# Altium PCB Pump_Agri.PcbDoc (part 2 of 2)
Units mm, origin at the board's own origin, x right, y up, seen from the top; angles counter-clockwise.
Board outline 92.13 x 124.56 mm, 2 copper layers (Top Layer, Bottom Layer); 134 components, 82 nets, 406 pads, 376 vias.
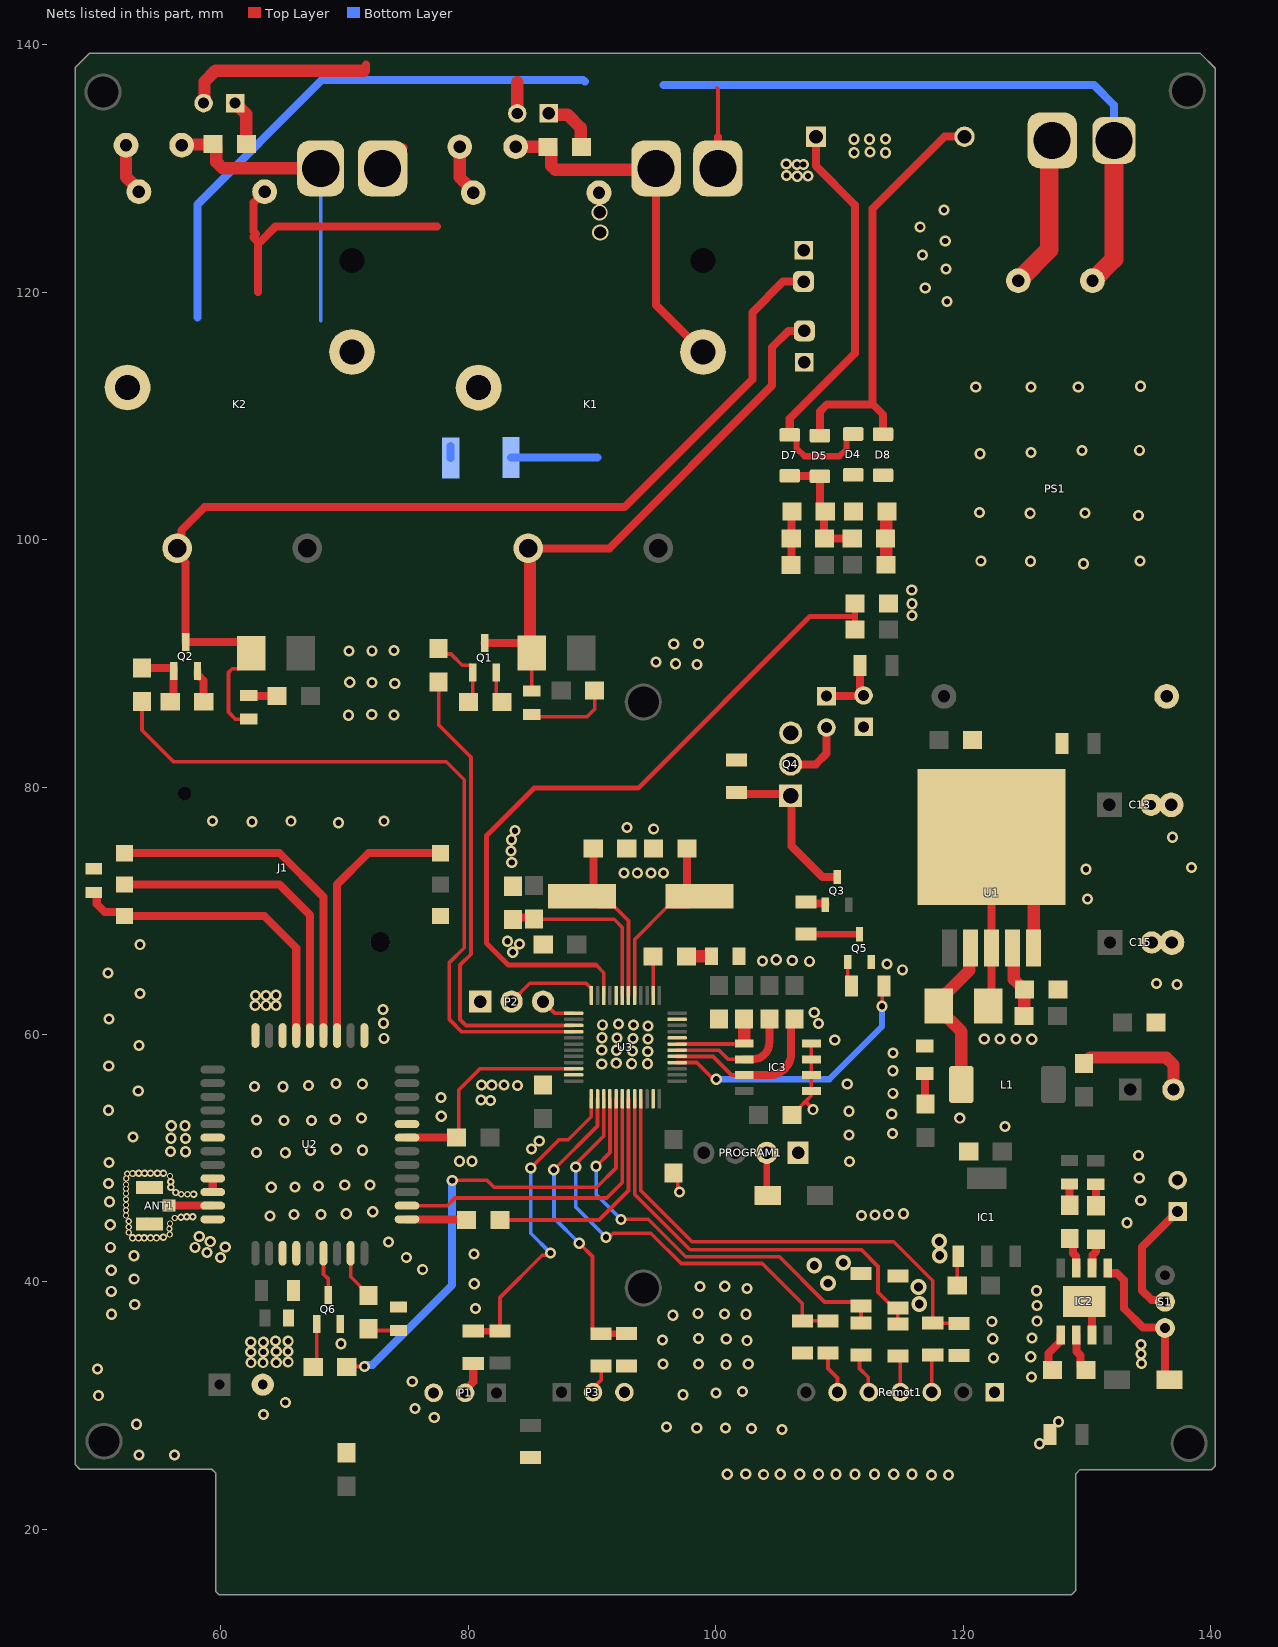
[diagram p2: the nets of this part, all layers, seen from the top]

## Via types
v1: diameter 0.9, hole 0.5, Top Layer to Bottom Layer, 325 vias
v2: diameter 0.5, hole 0.3, Top Layer to Bottom Layer, 19 vias
v3: diameter 0.6, hole 0.3, Top Layer to Bottom Layer, 19 vias
v4: diameter 1.27, hole 0.711, Top Layer to Bottom Layer, 9 vias
v5: diameter 1.3, hole 1, Top Layer to Bottom Layer, 2 vias
v6: diameter 0.9, hole 0.5, Top Layer to Bottom Layer, tented both sides, 2 vias

## Nets (pads, with @x,y where several pads share a name; then routed paths per layer and width w, separated by ;. In a path a pad name is that pad's centre, name@x,y a point inside that pad or via, vN(x,y) a via of type N, cw(c..) or ccw(c..) an arc to the next point about the centre after c; other vN are vias at no path point) (continued)
GND: 2.2k.2 ANT1.2 battery1.1 battery3.2 battery4.1 C1.1 C2.1 C3.1 C4.1 C5.2 C6.2 C7.2 C8.2 C9.2 C10.2 C11.2 C12.1 C13.2 C14.1 C15.2 C17.2 C19.1 C20.1 C21.1 C22.1 C23.2 C24.2 C25.2 C26.2 C27.1 C28.1 cs1.1 D1.1 D4.1 D8.1 IC1.1 IC2.1 IC2.3 IC2.9 IC3.1 IC3.2 IC3.3 IC3.4 J1.C5 LD1.2 LD2.2 LED5.1 Out3.1 P1.3 P2.1 P3.3 PROGRAM1.1 PS1.3 Q1.2 Q2.2 Q4.3 Q5.2 Q6.2 R4.1 R5.1 R14.2 R16.1 R22.2 R27.2 R29.2 R30.2 R31.2 R32.2 R43.2 Remot1.1 U1.3 U1.5 U2.8 U2.13 U2.19 U2.21 U2.27 U2.30 U2.31 U2.33 U2.36 U2.37 U3.8 U3.23 U3.35 U3.44 U3.47 | length 68.1
  Top Layer w0.3: U2.33@59.324,45.074 U2.33@59.334,45.064 ; C24.2@65.466,37.084 C24.2@65.466,37.309 ; cs1.1@65.867,39.319 cs1.1@66.084,39.536 ; U2.13@71.584,59.914 71.584,60.398 U2.13@71.746,60.56 ; LED5.1@74.346,37.983 LED5.1@74.646,38.283 ; J1.C5@77.743,69.571 J1.C5@77.902,69.412 ; Q1.2@82.255,89.274 82.255,87.319 R14.2@82.706,86.868 ; C1.1@86.008,67.361 C1.1@86.167,67.202 ; C3.1@86.2,55.931 C3.1@86.349,56.08 ; R43.2@92.607,33.071 R43.2@92.759,33.223 ; C2.1@96.585,48.808 96.926,48.467 96.926,47.396 v1(97.053,47.269) ; C4.1@100.222,61.229 C4.1@100.254,61.261 ; C25.2@106.15,53.492 106.2,53.492 106.775,54.067 106.775,54.117 107.246,54.588 ; IC3.4@107.716,59.258 IC3.3@107.716,57.988 IC3.2@107.716,56.718 IC3.1@107.716,55.448 107.716,55.058 107.246,54.588 ; v1(107.848,53.924) 107.848,53.985 107.246,54.588 ; C8.2@119.278,39.501 C8.2@119.503,39.726 IC1.1@119.503,41.996 ; IC1.1@119.417,41.91 IC1.1@119.503,41.996 ; IC1.1@119.595,42.087 IC1.1@119.503,41.996
  Top Layer w0.65: ANT1.2@54.016,44.902 ANT1.2@54.216,44.702 ; ANT1.2@54.117,47.752 ANT1.2@54.216,47.652 ; Q2.2@58.1,89.376 58.1,89.001 58.125,88.976 58.219,88.976 58.602,88.593 R22.2@58.602,86.893 ; U2.31@59.334,47.264 U2.30@59.334,48.364 ; U2.21@62.784,59.914 U2.21@62.784,60.589 ; R16.1@105.834,99.822 R16.1@106.088,100.076 ; C21.1@106.063,97.942 106.101,97.98 106.101,102.222 C19.1@106.139,102.26 ; C20.1@111.094,102.284 C20.1@111.117,102.26 ; D1.1@122.018,62.306 122.276,62.564 U1.3@122.276,66.976 U1.3@122.276,75.976 U1.3@126.441,80.141 ; 2.2k.2@127.203,32.868 126.873,33.198 126.873,34.239 127.356,34.722 127.839,35.205 127.839,35.693 IC2.1@127.864,35.718 ; IC2.9@129.769,38.43 130.404,37.795 IC2.3@130.404,35.718
  Top Layer w1: U1.5@125.676,66.976 U1.3@125.676,72.576 ; C17.2@129.769,57.666 129.769,57.716 129.994,57.941 130.044,57.941 130.244,58.141 136.394,58.141 136.98,57.555 C5.2@136.98,55.55
  other v1: 117.424,24.409 118.796,24.409 103.861,24.435 100.914,24.46 105.207,24.46 106.782,24.46 108.306,24.46 109.703,24.46 111.252,24.46 112.827,24.46 114.376,24.46 115.849,24.46 102.413,24.486 53.365,26.01 56.236,26.01 126.162,26.924 105.334,28.067 102.87,28.169 98.45,28.194 100.787,28.194 96.012,28.27 53.162,28.499 127.686,28.702 77.241,29.058 63.449,29.286 75.692,29.769 65.202,30.251 50.089,30.81 97.333,30.886 100,31.013 102.159,31.14 75.463,31.953 125.501,32.309 50.013,32.969 100.813,33.325 95.733,33.376 98.603,33.376 102.616,33.376 134.391,33.401 62.433,33.477 63.398,33.477 64.465,33.477 65.43,33.528 122.428,33.858 125.451,33.96 134.366,34.188 62.408,34.341 63.424,34.341 64.465,34.392 65.405,34.392 134.366,34.95 69.698,35.001 63.424,35.128 62.408,35.154 65.43,35.204 64.414,35.23 102.514,35.255 95.682,35.306 100.838,35.382 122.377,35.408 98.603,35.433 125.552,35.458 122.301,36.805 125.959,36.83 96.52,37.313 51.156,37.389 102.438,37.389 100.686,37.414 98.552,37.465 80.569,37.846 125.959,38.1 53.035,38.176 51.13,39.243 125.908,39.294 102.514,39.472 98.704,39.624 100.711,39.649 80.467,39.853 52.984,40.234 51.13,40.945 76.302,40.996 59.969,41.986 74.981,41.986 52.959,42.113 80.442,42.266 58.877,42.393 51.079,42.799 57.912,42.799 60.35,42.824 73.533,43.231 59.131,43.256 58.242,43.663 51.054,44.628 133.223,44.78 63.957,45.339 111.76,45.364 112.852,45.415 65.913,45.441 68.072,45.441 113.944,45.441 70.129,45.517 115.164,45.517 72.263,45.669 50.978,46.482 134.341,46.584 64.059,47.65 65.989,47.676 67.894,47.752 70.002,47.828 72.034,47.828 50.902,47.955 134.214,48.412 50.952,49.657 110.795,49.733 79.273,49.759 80.289,49.759 134.163,50.216 65.202,50.444 62.865,50.47 57.125,50.521 55.931,50.546 67.234,50.622 71.45,50.648 69.317,50.724 85.086,50.753 85.721,51.388 57.125,51.587 55.956,51.613 52.883,51.714 110.769,51.867 114.275,51.994 123.368,52.553 55.982,52.629 57.099,52.629 65.1,53.061 67.31,53.061 62.865,53.086 69.24,53.137 119.71,53.238 71.349,53.264 77.8,53.391 114.214,53.568 110.769,53.797 50.902,53.873 81.796,54.668 81.008,54.694 77.775,54.915 114.3,55.245 53.315,55.423 65.024,55.778 62.713,55.804 67.081,55.88 83.955,55.888 81.89,55.905 81.051,55.931 82.88,55.931 71.425,56.007 110.617,56.007 69.291,56.032 114.3,57.074 50.927,57.455 90.78,57.607 93.193,57.633 94.463,57.633 91.948,57.683 114.325,58.496 94.488,58.623 93.269,58.674 91.973,58.725 90.78,58.75 53.365,59.106 109.601,59.563 125.527,59.614 94.513,59.639 121.691,59.639 122.961,59.639 124.257,59.639 93.294,59.665 73.177,59.69 91.999,59.715 90.805,59.741 94.513,60.681 93.345,60.757 90.83,60.782 92.126,60.858 108.28,60.884 73.127,60.909 50.952,61.265 107.95,61.773 73.101,62.027 62.763,62.332 64.44,62.332 63.627,62.357 62.789,63.144 63.627,63.144 64.44,63.17 53.467,63.322 137.262,64.033 135.611,64.11 50.876,64.973 115.087,65.227 113.817,65.71 107.569,65.913 103.759,65.938 106.172,65.989 104.877,66.04 83.581,66.643 53.467,67.259 84.115,67.304 83.149,67.532 130.023,70.942 92.583,73.05 93.65,73.05 94.767,73.05 95.758,73.05 129.921,73.355 138.43,73.508 83.498,73.896 83.439,74.828 83.48,75.736 136.906,75.946 83.759,76.473 94.971,76.606 92.812,76.733 69.494,77.114 62.509,77.191 65.659,77.241 73.177,77.241 59.309,77.267 70.307,85.801 73.99,85.827 72.187,85.852 74.041,88.367 72.212,88.443 70.409,88.468 98.476,89.916 96.749,89.967 95.148,90.094 70.358,90.983 72.212,91.008 73.99,91.034 96.596,91.567 98.603,91.592 115.849,93.853 115.849,94.818 115.824,95.936 129.718,98.044 125.425,98.247 121.412,98.273 134.264,98.273 134.163,101.956 125.4,102.133 129.819,102.159 121.31,102.184 121.336,106.934 125.476,107.036 129.591,107.188 134.239,107.213 121.006,112.344 125.476,112.344 129.286,112.344 134.315,112.395 118.676,119.232 116.916,120.345 118.593,121.869 116.688,123.012 118.542,124.13 116.51,125.273 118.44,126.644 106.578,129.362 107.442,129.388 105.715,129.413 106.553,130.302 107.066,130.302 105.689,130.353 111.176,131.267 113.716,131.267 112.446,131.318 111.15,132.359 112.42,132.359 113.716,132.385
  other v2: 55.855,43.84 52.553,43.993 55.829,44.298 52.553,44.45 55.88,44.729 52.553,44.907 56.261,45.161 52.324,45.364 52.324,45.796 52.324,46.228 52.324,46.685 56.794,47.092 57.302,47.092 52.324,47.142 52.324,47.523 52.324,47.879 52.349,48.362 55.88,48.565 52.426,48.743
  other v3: 52.857,43.561 53.34,43.561 53.797,43.561 54.305,43.561 54.788,43.561 55.347,43.612 56.769,45.237 57.226,45.263 57.709,45.263 57.785,47.092 56.337,47.229 55.956,47.65 55.931,48.108 52.857,48.768 53.365,48.793 53.823,48.793 54.305,48.793 54.864,48.793 55.347,48.793
  other v4: 116.441,38.227 116.383,39.599 109.068,39.903 107.95,41.326 110.287,41.554 118.085,42.139 118.059,43.282
N: battery2.2 battery5.2 out1.2 out2.2 PS1.2 T1.1 | length 39.5
  Top Layer w0.3: 100.076,136.525 100.163,136.438 100.163,132.552
  Top Layer w0.65: battery5.2@58.598,135.28 battery5.2@58.672,135.354 ; 71.547,137.897 71.704,138.054 71.704,138.379 ; out2.2@73.061,129.997 73.061,130.097 74.636,131.672 out2.2@74.736,131.672 ; out1.2@100.163,129.997 100.163,132.552
  Top Layer w1: battery5.2@58.672,135.354 58.672,137.005 59.563,137.897 71.547,137.897 ; battery2.2@83.947,134.442 83.947,136.957 ; T1.1@126.949,132.029 T1.1@127.178,132.258
  Top Layer w1.5: PS1.2@124.434,120.925 126.949,123.44 T1.1@126.949,132.029
Net2.2k_1: 2.2k.1 IC2.2 | length 3.1
  Top Layer w0.65: IC2.2@129.134,35.718 129.134,34.392 129.464,34.061 129.464,33.257 2.2k.1@129.853,32.868
Net4.7k_1: 4.7k.1 U2.41 | length 4
  Top Layer w0.3: U2.41@70.484,42.314 70.484,40.415 71.933,38.967 4.7k.1@71.933,38.917
Net4.7k_2: 4.7k.2 LED5.2 | length 2.5
  Top Layer w0.3: 4.7k.2@71.933,36.217 72.066,36.083 LED5.2@74.346,36.083
NetANT1_1: ANT1.1 U2.32 | length 3.5
  Top Layer w0.65: ANT1.1@55.816,46.179 55.832,46.164 U2.32@59.334,46.164
Netbattery1_2: battery1.2 D3.1 K1.2 LED1.1 Q1.3 | length 47
  Top Layer w0.3: LED1.1@85.115,87.752 D3.1@85.115,90.834
  Top Layer w0.65: Q1.3@81.305,91.624 84.325,91.624 84.974,90.976 85.115,90.834 D3.1@85.119,90.83 ; K1.2@84.828,99.296 91.397,99.296 104.546,112.446 104.546,115.545 105.867,116.865 battery1.2@107.15,116.865
  Top Layer w1: K1.2@84.828,99.296 84.974,99.151 D3.1@84.974,90.976
Netbattery2_1: battery2.1 R7.2 | length 4.6
  Top Layer w1: battery2.1@86.487,134.442 86.586,134.343 88.009,134.343 89.069,133.282 89.069,131.788 R7.2@89.132,131.724
Netbattery3_1: battery3.1 S1.2 | length 9.8
  Top Layer w0.65: S1.2@136.296,38.405 136.161,38.54 135.221,38.54 134.442,39.319 134.442,42.824 battery3.1@137.312,45.695
Netbattery4_2: battery4.2 D6.1 K2.2 LED3.1 Q2.3 | length 84.1
  Top Layer w0.3: LED3.1@62.255,85.486 61.173,85.486 60.604,86.055 60.604,89.256 60.904,89.555 61.437,89.555 62.437,90.555 D6.1@62.437,90.805
  Top Layer w0.65: D6.1@62.437,90.805 62.437,90.901 61.612,91.726 Q2.3@57.15,91.726 57.15,98.136 56.457,98.83 K2.2@56.457,99.303 56.669,99.516 56.791,99.638 56.791,100.733 58.674,102.616 92.608,102.616 102.946,112.954 102.946,118.364 105.435,120.853 battery4.2@106.477,120.853
Netbattery5_1: battery5.1 R8.2 | length 3.7
  Top Layer w1: battery5.1@61.138,135.28 62.056,134.362 R8.2@62.056,131.978
NetBuzzer1_1: Buzzer1.1 Out3.2 R25.2 | length 5.6
  Top Layer w0.65: Buzzer1.1@108.941,87.351 108.966,87.376 111.912,87.376 Out3.2@111.938,87.401 111.938,87.631 111.633,87.936 R25.2@111.633,89.84
NetBuzzer1_2: Buzzer1.2 Q4.2 | length 5.4
  Top Layer w0.65: Q4.2@106.045,81.839 108.077,81.839 108.941,82.702 Buzzer1.2@108.941,84.811
NetC16_1: C16.1 R6.2 | length 4.2
  Top Layer w1: R6.2@79.299,131.75 79.299,129.275 80.391,128.183 C16.1@80.391,128.041
NetC18_1: C18.1 R17.2 | length 4.2
  Top Layer w1: R17.2@52.324,131.877 52.324,129.301 53.365,128.259 C18.1@53.365,128.118
NetC19_2: C19.2 D5.2 D7.2 R12.1 R16.2 | length 9.9
  Top Layer w0.65: D7.2@105.969,105.157 105.994,105.132 108.382,105.132 D5.2@108.407,105.106 108.407,102.66 108.807,102.26 C19.2@108.839,102.26 ; C19.2@108.723,102.26 108.723,100.141 R16.2@108.788,100.076 R12.1@111.02,100.076
NetC20_2: C20.2 R12.2 R13.1 | length 4.3
  Top Layer w1: R13.1@113.741,97.968 113.779,98.006 113.779,100.076 113.779,102.222 C20.2@113.817,102.26
NetC27_2: C27.2 U3.5 Y1.1 | length 15.7
  Top Layer w0.3: U3.5@93.435,63.159 93.435,67.679 96.076,70.321 97.829,70.321 Y1.1@98.679,71.171
  Top Layer w0.65: C27.2@97.667,75.032 97.667,71.82 98.342,71.145 Y1.1@98.679,71.145
NetC28_2: C28.2 U3.6 Y1.2 | length 14.1
  Top Layer w0.3: Y1.2@89.713,71.145 90.537,70.321 91.807,70.321 92.935,69.194 U3.6@92.935,63.159
  Top Layer w0.65: Y1.2@89.713,71.145 90.09,71.523 C28.2@90.09,75.032
NetD1_2: D1.2 L1.1 U1.2 | length 12.8
  Top Layer w1: L1.1@119.837,55.956 119.837,60.231 118.012,62.056 D1.2@118.012,62.306 118.662,62.956 118.662,63.366 120.476,65.18 120.476,66.876 U1.2@120.576,66.976
NetD2_A: D2.A IC2.5 S1.1 | length 12.7
  Top Layer w0.65: IC2.5@131.674,41.142 131.674,40.73 131.699,40.705 132.422,40.705 132.969,40.157 132.969,37.871 134.521,36.319 136.255,36.319 S1.1@136.296,36.278 ; S1.1@136.296,36.27 136.296,32.48 136.721,32.055 D2.A@136.786,32.055
NetD4_2: D4.2 D7.1 T2.1 | length 34.3
  Top Layer w0.3: D4.2@110.562,108.133 110.962,108.533 D4.2@111.1,108.533
  Top Layer w0.5: D7.1@106.506,108.057 106.506,107.387 107.163,106.731 109.982,106.731 110.562,107.311 D4.2@110.562,108.133
  Top Layer w0.65: D7.1@105.969,108.457 105.969,109.779 111.227,115.037 111.227,127.053 108.091,130.188 T2.1@108.091,132.563
NetD5_1: D5.1 D8.2 T2.2 | length 34.9
  Top Layer w0.6: 112.674,110.922 113.513,110.084
  Top Layer w0.65: D5.1@108.407,108.406 108.407,110.363 108.966,110.922 112.674,110.922 112.674,126.771 118.466,132.563 T2.2@120.091,132.563 ; D8.2@113.513,108.508 113.513,110.084
NetD_BATT1_A: D_BATT1.A PROGRAM1.2 | length 3.5
  Top Layer w0.3: D_BATT1.A@104.104,47.07 D_BATT1.A@104.184,46.99
  Top Layer w0.5: D_BATT1.A@104.104,47.07 PROGRAM1.2@104.104,50.438
NetIC2_6: IC2.6 R21.2 | length 2.4
  Top Layer w0.65: IC2.6@130.404,41.142 130.429,41.167 130.429,42.164 130.708,42.443 R21.2@130.708,43.456
NetIC2_7: IC2.7 R15.2 | length 2.6
  Top Layer w0.65: R15.2@128.6,43.506 128.88,43.227 128.88,42.316 129.109,42.087 129.109,41.167 IC2.7@129.134,41.142
NetLD1_1: LD1.1 R2.2 | length 2.5
  Top Layer w0.65: LD1.1@116.891,56.863 116.916,56.837 116.916,54.411 R2.2@116.942,54.385
NetLD2_1: LD2.1 R23.2 | length 2
  Top Layer w1: R23.2@97.616,66.319 LD2.1@99.662,66.319
NetLED1_2: LED1.2 R10.2 | length 6.9
  Top Layer w0.3: LED1.2@85.115,85.852 85.293,85.674 89.586,85.674 90.199,86.288 R10.2@90.199,87.808
NetLED2_1: LED2.1 R15.1 | length 1.7
  Top Layer w0.65: LED2.1@128.575,47.92 128.588,47.907 128.588,46.219 R15.1@128.6,46.206
NetLED3_2: LED3.2 R19.2 | length 2.3
  Top Layer w0.65: LED3.2@62.255,87.386 62.273,87.368 64.52,87.368 R19.2@64.538,87.351
NetLED4_1: LED4.1 R21.1 | length 1.7
  Top Layer w0.65: R21.1@130.708,46.156 LED4.1@130.708,47.894
NetP1_2: P1.2 R39.2 | length 2.7
  Top Layer w0.65: P1.2@79.729,31.039 79.729,31.266 80.389,31.926 R39.2@80.389,33.426
NetP3_2: P3.2 R42.2 | length 2.4
  Top Layer w0.3: P3.2@90.067,31.09 90.067,31.414 90.727,32.075 R42.2@90.727,33.218
NetQ1_1: Q1.1 R9.1 R14.1 | length 6.4
  Top Layer w0.3: R9.1@77.597,91.19 78.041,90.746 78.596,90.746 79.492,89.849 80.205,89.849 80.355,89.699 Q1.1@80.355,89.274 80.355,87.217 R14.1@80.006,86.868
NetQ2_1: Q2.1 R20.1 R22.1 | length 5.4
  Top Layer w0.65: R20.1@53.619,89.615 56.175,89.615 56.2,89.59 Q2.1@56.2,89.376 56.175,89.351 56.175,87.167 R22.1@55.902,86.893
NetQ3_1: Q3.1 R26.2 | length 1.7
  Top Layer w0.65: R26.2@107.264,70.714 107.382,70.596 108.829,70.596 108.854,70.571 Q3.1@108.854,70.478
NetQ3_3: Q3.3 Q4.1 R27.1 | length 13.3
  Top Layer w0.65: R27.1@101.676,79.578 101.816,79.438 105.905,79.438 Q4.1@106.045,79.299 ; Q4.1@106.121,79.299 106.121,75.235 108.628,72.728 Q3.3@109.804,72.728
NetQ5_1: Q5.1 R28.2 | length 2
  Top Layer w0.3: R28.2@110.658,63.851 Q5.1@110.658,65.855
NetQ5_3: Q5.3 R26.1 | length 4.3
  Top Layer w0.3: R26.1@107.264,68.118 R26.1@107.277,68.105
  Top Layer w0.5: R26.1@107.277,68.105 Q5.3@111.608,68.105
NetQ6_1: Q6.1 R33.1 | length 3.6
  Top Layer w0.3: R33.1@67.459,33.122 67.732,33.395 Q6.1@67.732,36.614
NetQ6_3: Q6.3 U2.39 | length 3.5
  Top Layer w0.3: U2.39@68.284,42.314 68.284,40.631 68.682,40.234 Q6.3@68.682,38.964
NetR1_1: R1.1 R4.2 U1.4 | length 5.9
  Top Layer w1: U1.4@123.976,66.976 124.076,66.876 124.076,64.466 124.889,63.652 R4.2@124.939,63.652 124.926,63.64 124.926,61.506 R1.1@124.913,61.493
NetR18_1: R18.1 Remot1.3 | length 3
  Top Layer w0.3: Remot1.3@117.45,31.09 117.45,34.005 R18.1@117.526,34.082
NetR37_1: R37.1 Remot1.4 | length 3
  Top Layer w0.3: R37.1@114.706,34.011 114.91,33.807 Remot1.4@114.91,31.09
NetR40_1: R40.1 U3.31 | length 18.8
  Top Layer w0.3: R40.1@82.554,45.009 90.551,45.009 92.935,47.392 U3.31@92.935,54.799
NetR44_1: R44.1 Remot1.5 | length 3.4
  Top Layer w0.3: R44.1@111.735,34.087 111.608,33.96 111.608,32.995 112.313,32.29 112.313,31.147 Remot1.5@112.37,31.09
NetR45_1: R45.1 Remot1.6 | length 4.1
  Top Layer w0.3: R45.1@109.542,33.884 109.167,34.259 R45.1@109.068,34.259 109.068,33.01 109.83,32.248 Remot1.6@109.83,31.09
ON_Queqtel: R33.2 U3.29 | length 39.4
  Top Layer w0.3: R33.2@70.159,33.122 70.209,33.172 v1(71.603,33.172) ; v1(78.689,48.209) 81.517,48.209 82.076,47.65 90.373,47.65 91.935,49.212 U3.29@91.935,54.799
  Bottom Layer w0.65: v1(71.603,33.172) 71.721,33.291 72.229,33.291 78.689,39.751 v1(78.689,48.209)
P: C16.2 C18.2 K1.1 K2.1 PS1.1 T1.2 | length 121
  Top Layer w0.65: 62.992,120.015 62.992,123.876 ; C18.2@63.525,128.118 62.636,127.229 62.636,124.892 62.84,124.689 62.636,124.485 62.636,124.418 63.001,124.053 63.17,124.053 64.414,125.298 77.457,125.298 ; K1.1@80.823,112.286 K1.1@81.354,112.818
  Top Layer w1.5: PS1.1@130.434,120.925 132.178,122.669 T1.2@132.178,132.258
  Bottom Layer w0.65: 58.09,117.932 58.09,127.076 68.174,137.16 89.256,137.16 89.408,137.008 ; 95.783,136.728 130.556,136.728 132.178,135.106 T1.2@132.178,132.258
  other v5: 90.653,124.816 90.602,126.441
P_1: K1.4 out1.1 R6.1 R7.1 R11.2 | length 34.4
  Top Layer w0.65: out1.1@95.163,129.997 95.163,118.952 K1.4@98.958,115.157
  Top Layer w1: R6.1@83.82,131.75 83.833,131.737 86.42,131.737 R7.1@86.432,131.724 86.482,131.724 86.707,131.499 86.707,130.209 87.02,129.896 out1.1@93.294,129.896
  Bottom Layer w0.65: R11.2@83.439,106.629 90.431,106.629
P_2: K2.4 out2.1 R8.1 R11.1 R17.1 | length 26.4
  Top Layer w1: R17.1@56.82,131.877 56.871,131.928 R8.1@59.305,131.928 ; R8.1@59.356,131.978 59.406,131.978 59.631,131.753 59.631,130.513 60.147,129.997 out2.1@68.061,129.997
  Bottom Layer w0.3: 68.061,117.689 out2.1@68.061,129.997
  Bottom Layer w0.65: K2.4@70.587,115.164 K2.4@70.954,115.164 ; R11.1@78.562,106.604 R11.1@78.562,107.555
pa0: R3.1 R5.2 U3.10 | length 60.7
  Top Layer w0.3: 90.322,65.608 90.935,64.996 U3.10@90.935,63.159
  Top Layer w0.4: 90.322,65.608 83.236,65.608 81.458,67.386 81.458,76.073 85.293,79.908 93.726,79.908 107.607,93.789 111.248,93.789
  Top Layer w0.5: R3.1@110.908,92.395 R3.1@111.248,92.735 111.248,93.789 R5.2@111.248,94.844
Pa2: P2.2 U3.12 | length 7.8
  Top Layer w0.3: P2.2@83.49,62.662 84.963,64.135 85.496,64.135 89.508,64.135 89.855,63.789 89.925,63.789 89.935,63.779 U3.12@89.935,63.159
Pa3: P2.3 U3.13 | length 2.9
  Top Layer w0.3: P2.3@86.03,62.662 86.963,61.729 U3.13@88.505,61.729
Pa11: R31.1 R37.2 U3.32 | length 35.3
  Top Layer w0.3: U3.32@93.435,54.799 93.435,47.078 97.917,42.596 111.76,42.596 113.106,41.25 113.106,39.167 114.381,37.892 R31.1@114.706,37.892 R37.2@114.706,36.607
Pa12: R18.2 R32.1 U3.33 | length 39.6
  Top Layer w0.3: U3.33@93.935,54.799 93.935,47.391 98.069,43.256 114.376,43.256 117.526,40.107 R18.2@117.526,36.678 117.546,36.657 R32.1@119.634,36.657
PB4: R28.1 U3.40 | length 21.7
  Top Layer w0.3: U3.40@96.865,57.729 98.456,57.729 99.797,56.388 v1(100.025,56.388) ; v1(113.436,62.281) R28.1@113.436,63.424
  Bottom Layer w0.5: v1(100.025,56.388) 109.169,56.388 113.436,60.655 v1(113.436,62.281)
PB12: R36.1 R39.1 U3.25 | length 26
  Top Layer w0.3: R36.1@82.528,36.022 R36.1@82.548,36.043 82.548,38.733 85.971,42.156 86.454,42.156 v1(86.639,42.342) ; v1(85.039,49.2) 87.325,51.486 88.062,51.486 89.935,53.359 U3.25@89.935,54.799
  Top Layer w0.5: R39.1@80.389,36.022 R36.1@82.528,36.022
  Bottom Layer w0.3: v1(85.039,49.2) 85.039,43.942 v1(86.639,42.342)
PB13: R42.1 R43.1 U3.26 | length 24.3
  Top Layer w0.3: v1(86.893,49.073) 90.435,52.614 U3.26@90.435,54.799 ; v1(88.951,43.129) 90.027,42.053 90.027,36.189 90.402,35.814 R42.1@90.727,35.814 R42.1@90.732,35.819
  Top Layer w0.5: R42.1@90.732,35.819 R43.1@92.759,35.819
  Bottom Layer w0.3: v1(86.893,49.073) 86.919,49.047 86.919,45.161 v1(88.951,43.129)
PB14: R29.1 R45.2 U3.27 | length 35
  Top Layer w0.3: v1(88.671,49.301) 88.671,49.53 90.935,51.793 U3.27@90.935,54.799 ; v1(91.11,43.612) 91.372,43.612 91.702,43.942 94.742,43.942 97.197,41.487 103.75,41.487 106.985,38.252 R29.1@106.985,36.835 107.005,36.855 R45.2@109.068,36.855
  Bottom Layer w0.3: v1(88.671,49.301) 88.671,46.05 v1(91.11,43.612)
PB15: R30.1 R44.2 U3.28 | length 34.7
  Top Layer w0.3: v1(90.322,49.352) 91.435,50.464 U3.28@91.435,54.799 ; v1(92.329,45.06) 94.539,45.06 97.561,42.037 105.131,42.037 108.784,38.384 111.395,38.384 R30.1@111.709,38.069 ; R44.2@111.735,36.683 R30.1@111.735,38.069
  Bottom Layer w0.3: v1(90.322,49.352) 90.322,47.066 v1(92.329,45.06)
PC13: R23.1 U3.2 | length 3.2
  Top Layer w0.2: R23.1@94.916,66.319 cw(c94.916,66.301) R23.1@94.935,66.301
  Top Layer w0.3: U3.2@94.935,63.159 R23.1@94.935,66.301
RI: R35.1 U2.7 U3.22 | length 17.9
  Top Layer w0.3: R35.1@79.041,51.664 79.223,51.845 79.223,55.524 80.927,57.229 U3.22@88.505,57.229
  Top Layer w0.65: U2.7@75.034,51.664 R35.1@79.041,51.664
RLY_1: R9.2 U3.15 | length 38.1
  Top Layer w0.3: R9.2@77.597,88.49 77.597,85.014 80.208,82.403 80.208,66.492 79.324,65.608 79.324,61.214 79.809,60.729 U3.15@88.505,60.729
RLY_2: R20.2 U3.16 | length 60.3
  Top Layer w0.3: R20.2@53.619,86.915 53.619,84.582 56.159,82.042 78.207,82.042 79.658,80.591 79.658,67.009 78.461,65.811 78.461,61.214 79.446,60.229 U3.16@88.505,60.229
RST: C22.2 R24.1 U3.7 | length 14.3
  Top Layer w0.3: 86.058,69.31 91.777,69.31 92.435,68.652 U3.7@92.435,63.159
  Top Layer w0.65: C22.2@83.439,69.465 R24.1@85.547,69.465
RX: U2.2 U3.30 | length 24.9
  Top Layer w0.3: U2.2@75.034,46.164 78.295,46.164 78.918,46.787 91.186,46.787 92.435,48.035 U3.30@92.435,54.799
SCL: IC3.6 R38.1 U3.42 | length 10.5
  Top Layer w0.3: U3.42@96.865,58.729 100.25,58.729 100.99,57.988 IC3.6@102.292,57.988
  Top Layer w0.65: IC3.6@102.292,57.988 102.972,57.988 ccw(c102.972,59.334) 104.318,59.334 R38.1@104.318,61.261
SDA: IC3.5 R41.1 U3.43 | length 7.1
  Top Layer w0.3: U3.43@96.865,59.229 IC3.5@102.262,59.229
  Top Layer w1: 102.286,59.588 R41.1@102.286,61.261
SIM_CLK: J1.C3 U2.16 | length 28.7
  Top Layer w0.65: J1.C3@52.203,74.651 64.745,74.651 68.284,71.111 U2.16@68.284,59.914
SIM_IO: J1.C7 U2.15 | length 21.6
  Top Layer w0.65: U2.15@69.384,59.914 69.384,72.128 71.907,74.651 J1.C7@77.743,74.651
SIM_RST: J1.C2 U2.17 | length 25.7
  Top Layer w0.65: J1.C2@52.203,72.111 64.719,72.111 67.184,69.645 U2.17@67.184,59.914
TX: R40.2 U2.1 | length 4.8
  Top Layer w0.65: U2.1@75.034,45.064 79.799,45.064 R40.2@79.854,45.009
V_SIM: C26.1 J1.C1 U2.18 | length 25.8
  Top Layer w0.65: C26.1@49.708,71.491 49.834,71.491 49.959,71.366 49.959,70.538 50.602,69.896 51.878,69.896 J1.C1@52.203,69.571 63.5,69.571 66.084,66.986 U2.18@66.084,59.914
WC: IC3.7 R34.1 U3.41 | length 13.7
  Top Layer w0.3: U3.41@96.865,58.229 99.759,58.229 101.255,56.733 102.277,56.733 IC3.7@102.292,56.718
  Top Layer w0.65: IC3.7@102.292,56.718 104.343,56.718 ccw(c104.343,58.445) 106.07,58.445 106.07,60.982 R34.1@106.35,61.261
pads on no net: D4.0 D5.0 D7.0 D8.0 J1. J1.C6 J2.1 J3.1 J4.1 J5.1 J6.1 J7.1 K1.5 K2.5 L1.0 Remot1.7 S1.3 U2.3 U2.4 U2.5 U2.6 U2.9 U2.10 U2.11 U2.12 U2.14 U2.20 U2.22 U2.23 U2.24 U2.25 U2.26 U2.28 U2.29 U2.38 U2.40 U2.42 U3.3 U3.4 U3.14 U3.17 U3.18 U3.19 U3.20 U3.21 U3.38 U3.39 U3.45 U3.46

## Polygon pours and split planes (outlines as drawn)
GND on Top Layer "GND_L01_P000" (solid, pour order 0): 140.157,25.222 48.514,25.222 48.514,94.361 103.302,94.361 103.302,108.966 113.386,116.916 140.132,116.916 140.132,25.298
GND on Top Layer "GND_L01_P005" (solid, pour order 5): 129.579,25.222 126.67,22.313 126.67,20.752 60.427,20.752 59.766,21.412 59.766,26.06
GND on Top Layer "GND_L01_P002" (solid, pour order 2): 119.837,111.836 119.837,133.68 107.823,133.68 104.902,133.68 104.902,106.426 118.059,106.426 118.186,106.299
GND on Bottom Layer "GND_L02_P007" (solid, pour order 7): 129.776,25.413 128.753,24.39 128.753,20.942 59.715,20.942 59.715,26.254
GND on Bottom Layer "GND_L02_P004" (solid, pour order 4): 48.793,25.298 48.92,25.171 140.005,25.171 140.005,116.002 121.463,116.002 121.463,133.985 104.496,133.985 104.496,101.143 48.768,101.143 48.768,25.298

## Other copper
Top Layer:
  region net N: 97.526,138.268 95.479,136.22 98.28,133.418 100.328,135.466
  region net N: 104.939,136.674 102.892,138.721 100.09,135.919 102.137,133.872
  region net N: 125.98,133.44 128.028,135.487 125.226,138.289 123.178,136.242
  region net P: 58.118,111.966 62.357,116.205 60.642,117.919 56.404,113.681
  rectangle net 12v: 114.757,66.7 118.601,68.25
  rectangle net 12v: 83.439,19.787 90.068,21.895
  region net 3.3v: 99.532,64.738 99.532,63.188 107.075,63.188 107.075,64.738
  rectangle net 3.3v: 101.498,52.883 103.138,55.296
  region net 3.3v: 97.511,64.738 97.511,63.188 100.268,63.188 100.268,64.738
  rectangle net 3.3v: 97.511,62.078 99.289,63.703
  rectangle net 3.3v: 118.262,45.11 125.4,49.2
  region net 3.3v: 102.58,55.772 102.58,52.774 103.138,52.774 103.138,55.772
  region net 3.3v: 88.138,68.25 88.138,66.243 91.542,66.243 91.542,68.25
  rectangle net 3.3v: 85.138,73.139 86.154,75.004
  rectangle net 3.3v: 82.982,52.603 88.57,54.178
  rectangle net 3.3v: 95.797,52.146 99.593,53.86
  rectangle net P: 50.546,110.261 64.389,114.224
  rectangle net P: 60.249,111.074 64.389,128.956
  rectangle net P: 63.576,124.003 91.338,126.594
  rectangle net P: 86.919,124.003 91.338,128.829
  rectangle net P_1: 92.786,113.081 97.231,132.918
  rectangle net P_1: 93.65,113.081 100.863,117.729
  rectangle net N: 70.993,136.119 128.651,138.862
  rectangle net N: 98.095,127.66 102.235,136.347
  rectangle net N: 70.993,127.61 75.108,137.566
  rectangle net N: 125.578,130.023 128.651,136.855
  rectangle net 5v: 62.357,36.5 64.008,41.504
  region net 5v: 64.211,43.332 62.459,43.332 62.459,41.3 64.211,41.3
  pour cut-out: 52.603,45.237 52.603,47.066 52.527,47.142 52.553,47.168 55.321,47.168 55.321,45.314 55.245,45.237 55.321,45.314 55.245,45.237
Bottom Layer:
  region net P: 130.683,138.786 128.636,136.738 131.437,133.936 133.485,135.984
  region net P: 90.373,114.681 88.326,116.728 85.524,113.927 87.571,111.879
  region net P_1: 99.212,109.322 97.165,111.369 94.363,108.567 96.411,106.52
  region net P_2: 69.317,106.578 71.364,108.626 68.562,111.428 66.515,109.38
  region net P: 94.844,136.55 92.796,138.598 89.994,135.796 92.042,133.749
  region net P: 58.877,116.053 57.569,117.361 53.492,113.284 54.8,111.976
  rectangle net 12v: 114.757,66.726 117.399,68.199
  rectangle net 12v: 83.312,19.964 90.068,22.123
  region net 3.3v: 97.5,64.738 97.5,62.103 99.582,62.103 99.582,64.738
  rectangle net 3.3v: 118.466,45.034 125.349,48.362
  rectangle net 3.3v: 96.139,52.4 103.505,55.321
  rectangle net 3.3v: 96.212,52.4 99.847,54.254
  region net 3.3v: 89.408,68.24 89.408,66.065 92.126,66.065 92.126,68.24
  rectangle net 3.3v: 85.09,73.254 86.182,75.032
  rectangle net 3.3v: 82.895,52.299 88.9,54.381
  region net P: 51.571,113.715 51.601,111.551 58.8,111.651 58.77,113.815
  rectangle net P: 56.335,111.633 59.207,128.284
  region net P: 58.273,126.257 69.413,136.91 67.475,138.937 56.335,128.284
  rectangle net P: 67.475,136.754 88.417,138.937
  rectangle net P: 78.867,110.414 92.075,114.173
  rectangle net P: 130.581,130.378 134.29,138.633
  rectangle net P: 88.341,136.271 134.29,138.937
  rectangle net P: 88.113,111.227 92.075,138.557
  rectangle net P_1: 81.737,104.572 101.016,108.864
  rectangle net P_1: 96.977,104.572 101.016,117.069
  rectangle net P_2: 65.913,116.84 68.834,132.029
  rectangle net P_2: 68.097,113.081 72.669,117.221
  rectangle net P_2: 65.913,104.546 68.936,117.246
  rectangle net P_2: 65.913,104.546 80.035,108.814

## Silkscreen, mask and mechanical layers (free items; w line width, h text height)
Top Overlay:
  the board outline again, w0.254

## Text inside footprints (layer, text, board x,y; h text height)
K1: Top Overlay "NT90TNCE12CB" at 84.891,95.672 h1; Top Overlay "DC12V" at 88.391,94.422 h1; Top Overlay "COM" at 83.891,111.172 h1 r90; Top Overlay "NO" at 96.391,114.172 h1 r90; Top Overlay "NC" at 96.391,121.672 h1 r90
K2: Top Overlay "NT90TNCE12CB" at 56.519,95.679 h1; Top Overlay "DC12V" at 60.019,94.429 h1; Top Overlay "COM" at 55.519,111.179 h1 r90; Top Overlay "NO" at 68.019,114.179 h1 r90; Top Overlay "NC" at 68.019,121.679 h1 r90
out1: Top Overlay "1" at 94.891,132.162 h1; Top Overlay "2" at 99.717,132.162 h1
out2: Top Overlay "1" at 67.789,132.162 h1; Top Overlay "2" at 72.615,132.162 h1
T1: Top Overlay "1" at 126.906,134.423 h1; Top Overlay "2" at 131.732,134.423 h1